# Altium PCB hv-distribution-board.PcbDoc
Units mm, origin at the board's own origin, x right, y up, seen from the top; angles counter-clockwise.
Board outline 75 x 47 mm, 2 copper layers (Top Layer, Bottom Layer), stack 1.57 mm thick; 31 components, 24 nets, 77 pads, 5 vias.
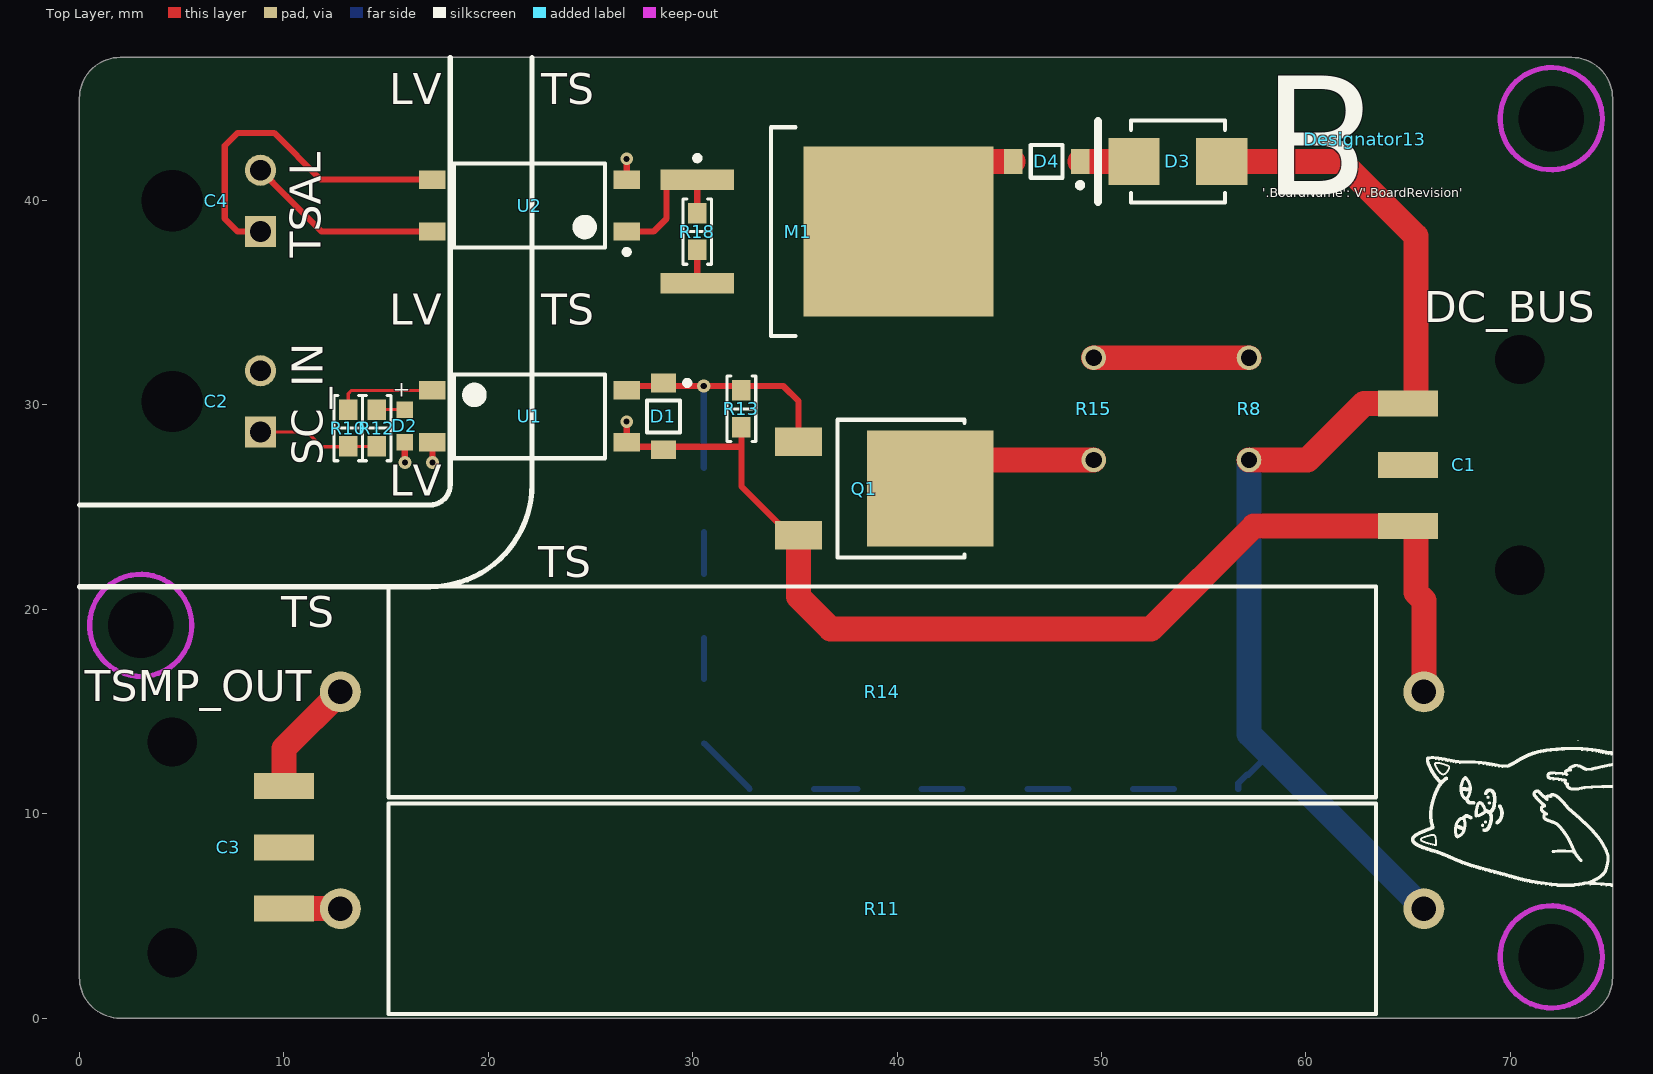
[diagram p0: Top Layer view]
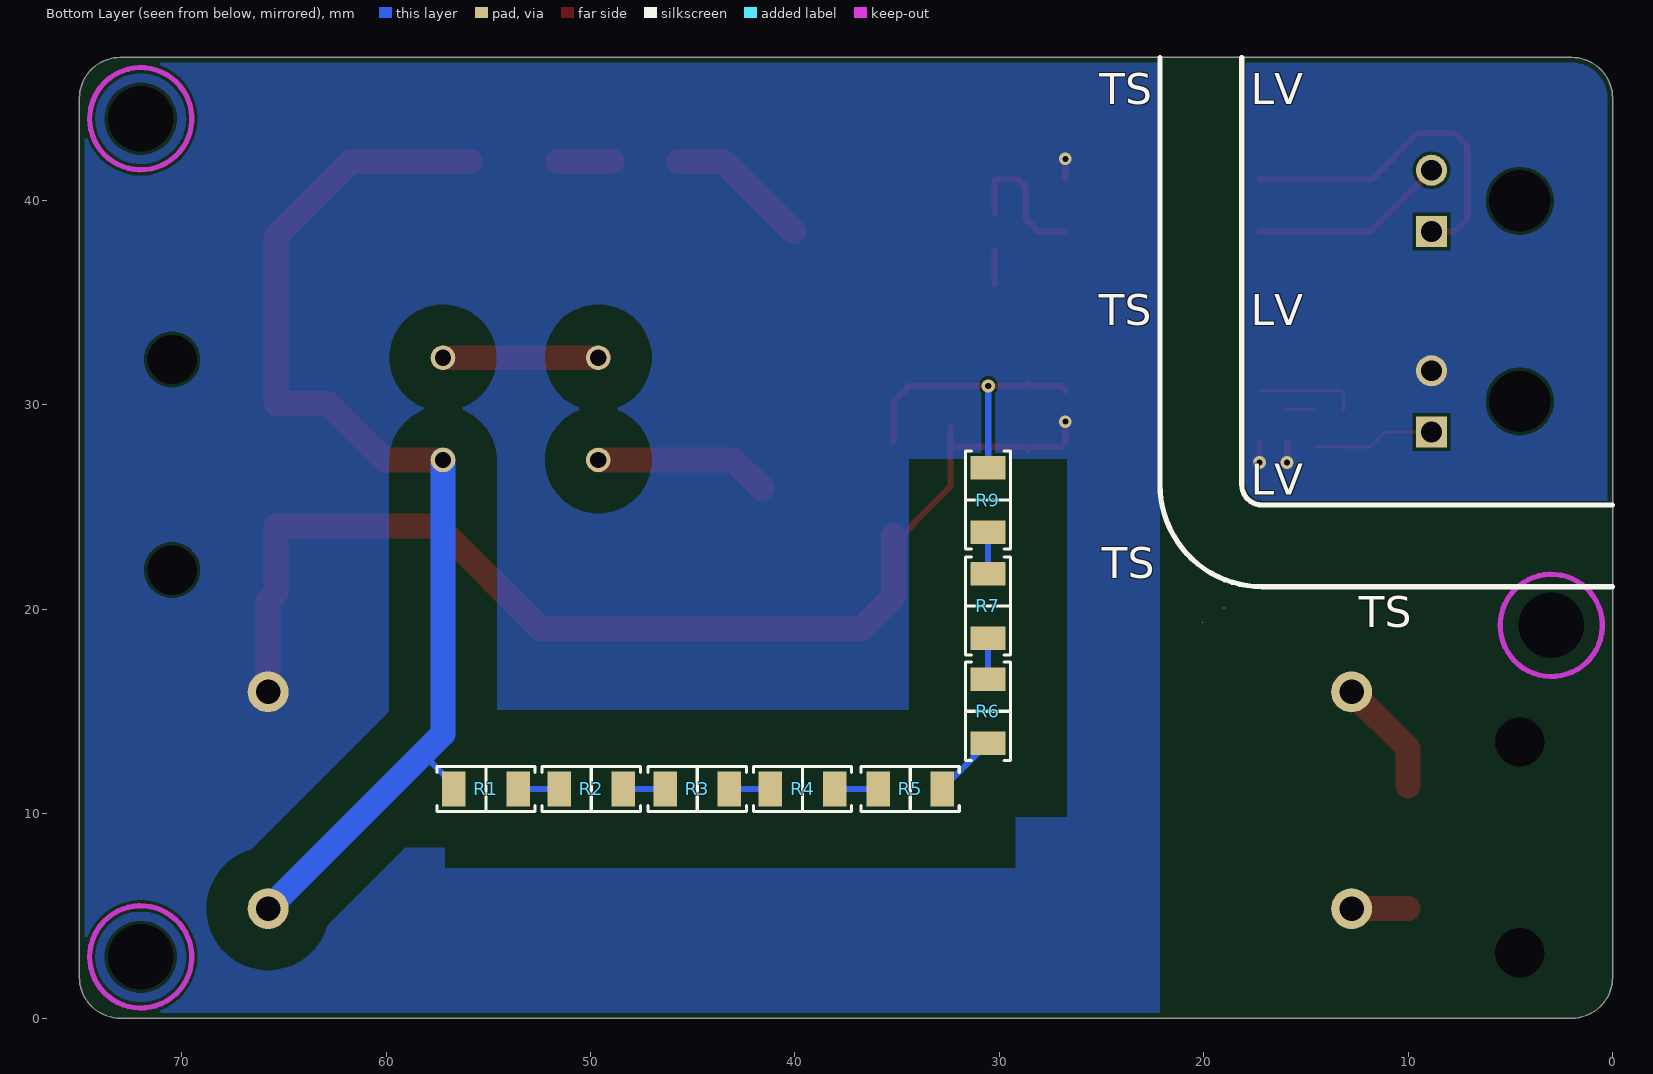
[diagram p1: Bottom Layer view, seen from below]
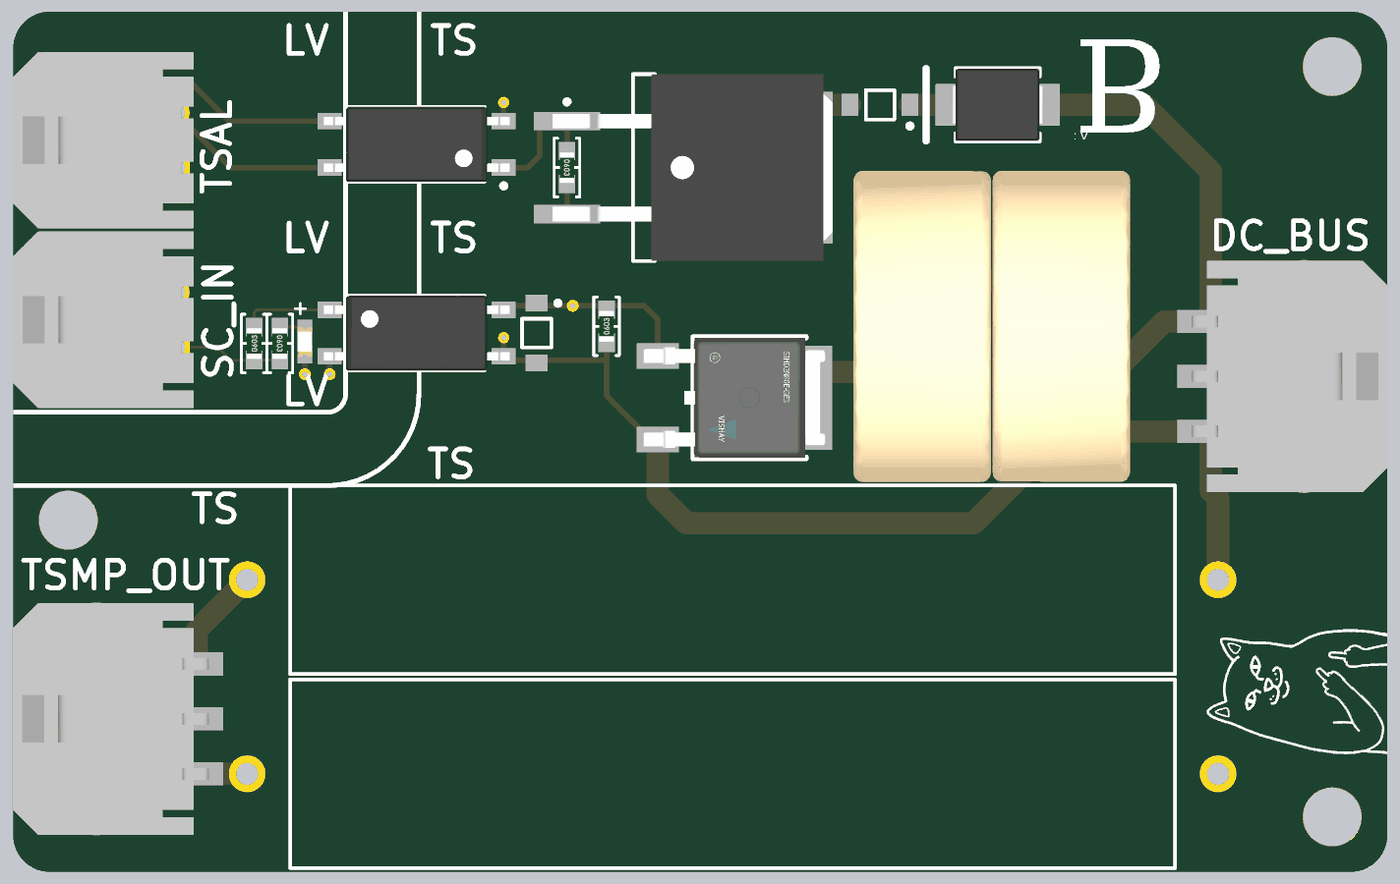
[diagram p2: 3D render of the assembled board from above, using the file's embedded part models]
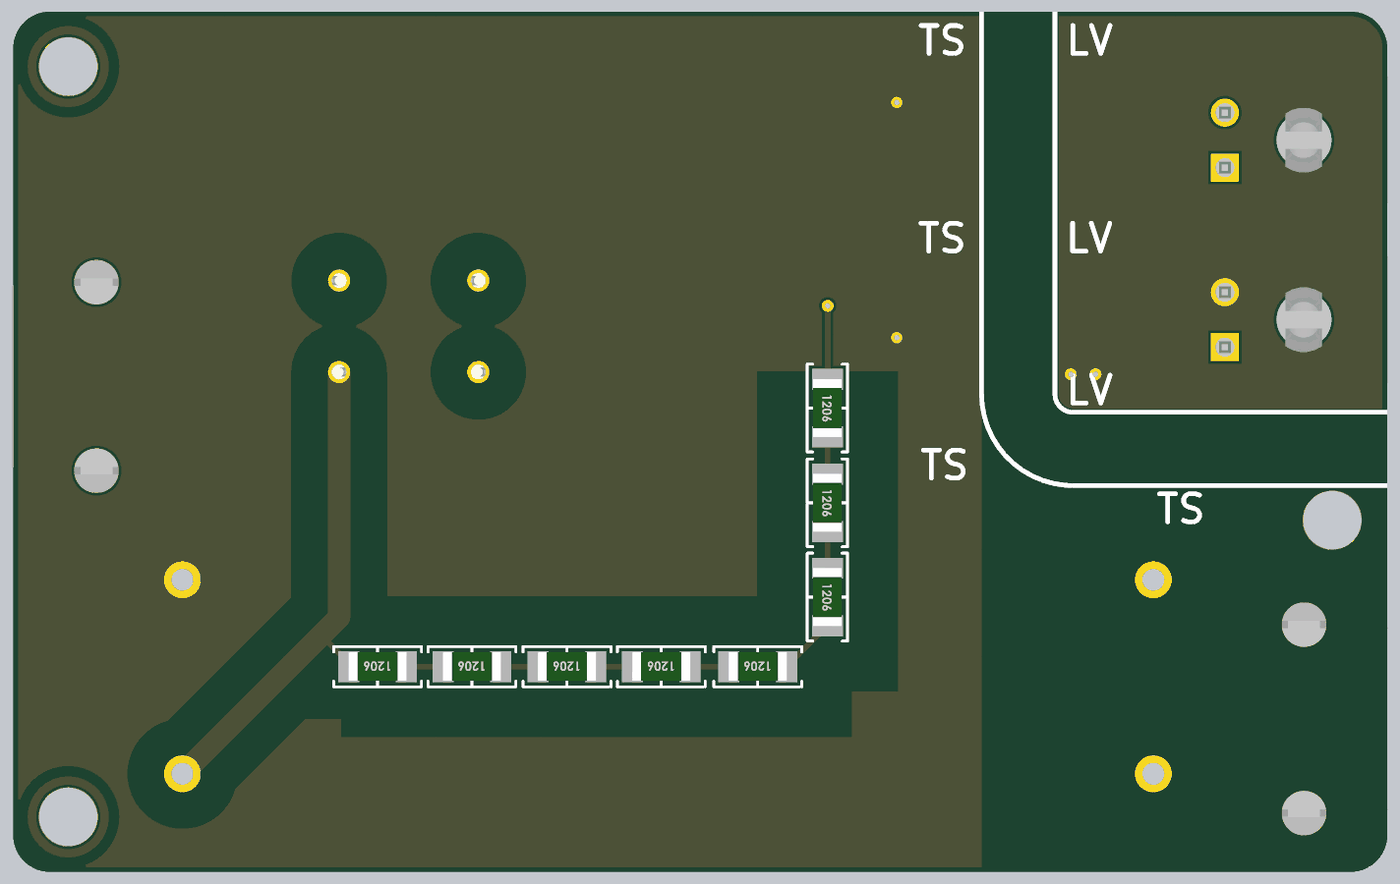
[diagram p3: 3D render of the assembled board from below, using the file's embedded part models]

## Layer stack, top to bottom
Top Solder: solder mask 0.015, Solder Resist, Dk 3.5
Top Layer: signal copper 0.035
Dielectric 1: dielectric 1.5, FR-4, Dk 4.8
Bottom Layer: signal copper 0.035
Bottom Solder: solder mask 0.015, Solder Resist, Dk 3.5

## Board outline
2,0 cw(c2,2) 0,2 0,45 cw(c2,45) 2,47 73,47 cw(c73,45) 75,45 75,2 cw(c73,2) 73,0

## Design rules (kind name [scope] priority, off if disabled: settings)
AcuteAngle [All] p1: minimum=4.50000000000000E+0001 checktracksonly=FALSE
BoardOutlineClearance [All] p1: gap=0.254 ignorepadtopadclearanceinfootprint=FALSE
Clearance Clearance_HV_Gate [InNet('TS-') vs InNet('GATE')] p1: gap=0.152 ignorepadtopadclearanceinfootprint=FALSE
Clearance Clearance_HV_VD [InNetClass('TS_VD') vs InNetClass('TS_VD')] p2: gap=2 ignorepadtopadclearanceinfootprint=FALSE
Clearance Clearance_HV_IM [InNetClass('TS_IM') vs InNetClass('TS_IM')] p3: gap=2 ignorepadtopadclearanceinfootprint=FALSE
Clearance Clearance_HV [InNetClass('TS') vs InNetClass('TS')] p4: gap=3 ignorepadtopadclearanceinfootprint=TRUE
Clearance Clearance_COMP [InNetClass('TS_COMP') vs InNetClass('TS_COMP') AND NOT InNet('TS+')] p5: gap=0.152 ignorepadtopadclearanceinfootprint=FALSE
Clearance Clearance_HV_LV [InNetClass('GLVS') vs InNetClass('TS') OR InNetClass('TS_IM') OR InNetClass('TS_COMP')] p6: gap=4 ignorepadtopadclearanceinfootprint=FALSE
Clearance Clearance_HV_TS_COMP [InNetClass('TS_COMP') vs (InNetClass('TS') OR InNetClass('TS_IM')) AND NOT (InNet('GATE') OR InNet('TS-'))] p7: gap=4 ignorepadtopadclearanceinfootprint=FALSE
Clearance [All] p8: gap=0.152 ignorepadtopadclearanceinfootprint=FALSE
ComponentClearance [All] p1: gap=0.1 collisioncheckmode=3 verticalgap=0.254 showdistances=FALSE
FanoutControl Fanout_Small [All] p1 off: bgadir=Out bgaviamode=Centered fanoutstyle=Auto fanoutdirection=Alternating viagrid=0.025 // Protel DXP Scope 1 Expression Was: (CompPinCount < 5)   Fanout_Small (Default Rule)
FanoutControl Fanout_Default [All] p2: bgadir=Out bgaviamode=Centered fanoutstyle=Auto fanoutdirection=Alternating viagrid=0.025 // Fanout_Default (Default Rule)
FanoutControl Fanout_SOIC [All] p3 off: bgadir=Out bgaviamode=Centered fanoutstyle=Auto fanoutdirection=Alternating viagrid=0.025 // Protel DXP Scope 1 Expression Was: IsSOIC   Fanout_SOIC (Default Rule)
FanoutControl Fanout_BGA [All] p4 off: bgadir=Out bgaviamode=Centered fanoutstyle=Auto fanoutdirection=Alternating viagrid=0.025 // Protel DXP Scope 1 Expression Was: IsBGA   Fanout_BGA (Default Rule)
FanoutControl Fanout_LCC [All] p5 off: bgadir=Out bgaviamode=Centered fanoutstyle=Auto fanoutdirection=Alternating viagrid=0.025 // Protel DXP Scope 1 Expression Was: IsLCC   Fanout_LCC (Default Rule)
HoleSize [All] p1: absolutevalues=TRUE maxlimit=7 minlimit=0.2 maxpercent=80.000 minpercent=20.000
MinimumAnnularRing [All] p1: minimumring=0.17
PolygonConnect [All] p1: connectstyle=Direct reliefconductorwidth=0.254 reliefentries=4 polygonreliefangle="90 Angle" airgapwidth=0.254
RoutingVias [All] p1: holewidth=0.3 width=0.64 viastyle="Through Hole" minholewidth=0.3 minwidth=0.61 maxholewidth=0.711 maxwidth=1.27
SMDEntry [All] p1 off: side=TRUE corner=TRUE anyangle=TRUE // Protel DXP Scope 1 Expression Was: not IsRoundPad
SMDToCorner [All] p1: distance=60000
SilkToSolderMaskClearance [All] p1 off: minsilkscreentomaskgap=0.254 clearancetoexposedcopper=TRUE // Protel DXP Scope 1 Expression Was: IsPad
SolderMaskExpansion [All] p1: expansion=0 istentingtop=FALSE
Width [All] p1: maxlimit=1.219 minlimit=0.152 preferedwidth=0.305
22 further rules are at their usual default settings.

## Classes and differential pairs
net class TS: GATE NetC1_2 NetQ1_4 NetR1_1 NetR2_1 NetR3_1 NetR4_1 NetR5_1 NetR6_1 NetR7_1 NetR8_2 TS+ TS-
component class voltage-detection: C4 D3 D4 M1 R18 U2
component class tsmp-resistors: C3 R11 R14
net class TS_VD: GATE NetR1_1 NetR2_1 NetR3_1 NetR4_1 NetR5_1 NetR6_1 NetR7_1 TS+
net class TS_COMP: NetC1_2 NetD3_2 NetD4_2 NetM1_1 NetM1_2 TS+ TS-
net class TS_IM: NetQ1_4 NetR8_2 TS+ TS-
net class GLVS: GND NetD2_2 NetR10_2 SC_END
component class discharge-circuit: C1 C2 D1 D2 Q1 R1 R2 R3 R4 R5 R6 R7 R8 R9 R10 R12 R13 R15 U1

## Components (designator, comment, footprint, x,y, rotation, side; value= is the part's Value field where it differs from the comment)
C1 "DC_BUS" 43650-0309 70.46,27.069 r90 top
C2 "SC_IN" 43650-0200 8.86,30.169 r270 top
C3 "TSMP_OUT" 43650-0309 4.54,8.358 r270 top
C4 "TSAL" 43650-0200 8.86,39.981 r270 top
D1 "MMSZ4707T1G" ONSC-SOD-123-2-425-04_V 28.571,29.439 r270 top
D2 "150060GS55040" WL-SMCW_0603_H=0.7 15.921,28.969 r90 top
D3 "S1MB-13-F" DIOD-SMB-2_V 53.732,41.91 r180 top
D4 "SZMMSZ5261BT1G" ONSC-SOD-123-2-425-04_V 47.316,41.91 r180 top
Designator13 "Comment" LOGO_BALTIC_10mm 62.865,43 r0 top
M1 "IXTA08N100D2HV" IXYS_TO-263HV 36.576,38.481 r0 top
Q1 "SIHD2N80E-GE3" FP-T16-0236-MFG 39.37,25.908 r270 top
R1 "SMD Resistor" "STACKPOLE CSR1206" 55.112,11.214 r0 bottom value=100k
R2 "SMD Resistor" "STACKPOLE CSR1206" 49.962,11.214 r0 bottom value=100k
R3 "SMD Resistor" "STACKPOLE CSR1206" 44.777,11.214 r0 bottom value=100k
R4 "SMD Resistor" "STACKPOLE CSR1206" 39.626,11.214 r0 bottom value=100k
R5 "SMD Resistor" "STACKPOLE CSR1206" 34.359,11.214 r0 bottom value=100k
R6 "SMD Resistor" "STACKPOLE CSR1206" 30.558,15.015 r270 bottom value=100k
R7 "SMD Resistor" "STACKPOLE CSR1206" 30.558,20.165 r270 bottom value=100k
R8 "PTCEL13R501RBE" PTCEL13 57.214,29.808 r90 top
R8 "PTCEL17R501TBE" PTCEL17 57.214,29.808 r90 top
R9 "SMD Resistor" "STACKPOLE CSR1206" 30.558,25.342 r270 bottom value=100k
R10 "SMD Resistor" "STACKPOLE CSR0603" 13.154,28.869 r90 top value=2k2
R11 "40F15KE" OHMITE_40_SERIES 39.267,5.358 r180 top
R12 "SMD Resistor" "STACKPOLE CSR0603" 14.551,28.869 r270 top value=820
R13 "SMD Resistor" "STACKPOLE CSR0603" 32.385,29.809 r90 top value=100k
R14 "40F15KE" OHMITE_40_SERIES 39.267,15.958 r180 top
R15 "PTCEL13R501RBE" PTCEL13 49.613,29.808 r270 top
R15 "PTCEL17R501TBE" PTCEL17 49.613,29.808 r270 top
R18 "SMD Resistor" "STACKPOLE CSR0603" 30.226,38.481 r270 top value=2k2
U1 "TCLT1000" VISH-SOP4L-4_V 22.021,29.439 r0 top
U2 "TCLT1000" VISH-SOP4L-4_V 22.021,39.751 r180 top

## Footprints (in the part's own frame and the unit in brackets; to place one, negate y for a bottom-side part, rotate by r counter-clockwise, add the part's x,y. Pads: shape width x height; smd on the part's side, far side on the other; paste and mask are expansions set on the pad)
43650-0200 [mm] "Micro-Fit 3.0 Right Angle Header, 3.00mm Pitch, Single Row, 2 Circuits"
  rect 1.524x1.524 hole 1.02: 1(1.5,0)
  round 1.524 hole 1.02: 2(-1.5,0)
  round 0 hole 3 unplated: ""(0,-4.32)
  body extent -4.83,-8.9 4.83,1, height 5.64
43650-0309 [mm] "Micro-Fit 3.0 Right-Angle Header, 3.00mm Pitch, Single Row, 3 Circuits, with PCB Press-fit Metal Retention Clip, Tin, Glow-Wire Capable, Black"
  rect 1.27x2.92 smd: 1(3,5.47) 2(0,5.47) 3(-3,5.47)
  round 0 hole 2.41: ""(-5.15,0) ""(5.15,0)
  body extent -6.32,-4.6 6.33,6.14, height 5.64
DIOD-SMB-2_V [mm] "Molded Diode, 2-Leads, Body 4.57x3.94mm"
  rect 2.5x2.3 smd: 1(-2.15,0) 2(2.15,0)
  silkscreen extent -2.3,-2 3.9,2, body extent -2.5,-1.97 2.5,1.97, height 2.5
FP-T16-0236-MFG [mil]
  rect 55x90 smd paste+0 mask+0: 1(-90,-165) 3(90,-165)
  rect 224.02x243.31 smd paste+0 mask+0: 4(0,88.35)
  silkscreen extent -132,-90 132,155, body extent -136,-214 136,214, height 10
IXYS_TO-263HV [mm] "D2-PAK, 3-Pads, Body 7,80x8,46mm (max), IPC Medium Density"
  rect 3.6x1 smd: 1(-6.35,2.54) 2(-6.35,-2.54)
  rect 9.3x8.3 smd: 3(3.5,0)
  silkscreen extent -6.47,-5.1 -1.55,5.1, body extent -7.15,-5.1 8.15,5.1, height 4.7
LOGO_BALTIC_10mm [mm]
OHMITE_40_SERIES [mm] "Ohmicone ® Silicone-Ceramic Conformal  Axial Terminal Wirewound  1% and 5% Tolerance Standard"
  round 2 hole 1.2: 1(-26.5,0) 2(26.5,0)
  silkscreen extent -24.15,-5.15 24.15,5.15, body extent -24.15,-5.15 24.15,5.15, height 10.3
ONSC-SOD-123-2-425-04_V [mm] "SOD, 2-Leads, Body 2.69x1.6mm"
  rect 0.91x1.22 smd: 1(-1.635,0) 2(1.635,0)
  silkscreen extent -1.76,-0.8 0.78,1.29, body extent -1.35,-0.8 1.35,0.8, height 1.35
PTCEL13 [mm]
  round 1.2 hole 0.8: 1(-2.5,0) 2(2.5,0)
  body extent -6.75,-3.5 6.75,3.5, height 16.75
PTCEL17 [mm]
  round 1.2 hole 0.8: 1(-2.5,0) 2(2.5,0)
  body extent -8.5,-3.75 8.5,3.75, height 20.25
"STACKPOLE CSR0603" [mm] "Chip Resistor, 2-Leads, Body 1.60x0.80mm, IPC Medium Density"
  rect 1x0.9 smd: 1(-0.9,0) 2(0.9,0)
  silkscreen extent -1.6,-0.7 1.6,0.7, body extent -0.85,-0.4 0.85,0.4, height 0.45
"STACKPOLE CSR1206" [mm] "Chip Resistor, 2-Leads, Body 3.13x1.55mm, IPC Medium Density"
  rect 1.15x1.7 smd: 1(-1.575,0) 2(1.575,0)
  silkscreen extent -2.4,-1.1 2.4,1.1, body extent -1.6,-0.78 1.6,0.77, height 0.55
VISH-SOP4L-4_V [mm] "SOP, 4-Leads, Body 4.1x7.7mm, Pitch 2.54mm"
  rect 1.3x0.9 smd: 1(-4.75,1.27) 2(-4.75,-1.27) 3(4.75,-1.27) 4(4.75,1.27)
  silkscreen extent -3.7,-2.05 3.7,2.05, body extent -5.07,-2.05 5.07,2.05, height 2.3
WL-SMCW_0603_H=0.7 [mm] "SMD Mono-color Chip LED, body 1.6x0.8mm"
  rect 0.8x0.8 smd: 1(-0.8,0) 2(0.8,0)
  body extent -0.8,-0.4 0.8,0.4, height 0.7

## Part data
C1 C3: library part "MicroFit3.0 3-Pin", "Molex Micro-Fit 3.0 3-Pin / 600V / 8.5A"
C2 C4: library part "MicroFit3.0 2-Pin", "Molex Micro-Fit 3.0 2-Pin / 600V / 8.5A"
D1: library part CMP-1060-00328-1, "Zener Voltage Regulator, 500 mW, 2-Pin SOD-123, Pb-Free, Tape and Reel", Manufacturer="On Semiconductor", ComponentLink1Description="Manufacturer URL", ComponentLink1URL=http://www.onsemi.com/, ComponentLink2Description=Datasheet, ComponentLink2URL=http://www.onsemi.com/pub_link/Collateral/MMSZ4678T1-D.PDF, ComponentLink3Description="Package Specification", ComponentLink3URL=http://www.onsemi.com/pub_link/Collateral/425-04.PDF, DatasheetVersion="Rev. 9", Mounting Technology="Surface Mount", P Max (W)=0.5, PackageDescription="2-Pin SOD, Body 1.6 x 2.69 mm", PackageReference=SOD-123-2-425-04, PackageVersion="Rev. G, 10/2009", Packing="Tape and Reel", PartNumber=MMSZ4707T1G, RoHS=Pb-Free, VZ Typ (V)=20
D2: library part 150060GS75000, "SMT Mono-color Chip LED Waterclear WL-SMCW, size 0603, Green, 3.2 V, 140 deg, 430 mcd", Emitting Color=Green, Forward Voltage="3.2 V", Operating Temperature="-40 to 85 degC", Chip Technology=InGaN, ComponentLink1Description=Manufacturer, ComponentLink1URL=http://www.we-online.de, ComponentLink2Description=Datasheet, ComponentLink2URL=https://katalog.we-online.de/led/datasheet/150060GS75000.pdf, Dominant Wavelength="525 nm", Luminous Intensity="430 mcd", Mounting Technology=SMT, Packaging="Tape and Reel", Part Number=150060GS75000, Peak Wavelength="515 nm", Published Date="November 2018", Publisher="Wurth Elektronik", Size=0603, Viewing Angle="140 deg"
D3: library part CMP-2000-07013-1, "Surface Mount Glass Passivated Rectifier / , 1 A, 1.1 V, -65 to 150 degC, 2-Pin SMD, RoHS, Tape and Reel", Average Rectified Current-Max=1A, Forward Voltage=1.1V, Manufacturer="Diodes Inc", Package Description="2-Pin Surface Mount Device, Body 4.315 x 3.62 mm", Package Reference=SMB-2, Peak Current-Max=30A, Reverse Current-Max=5µA, Reverse Voltage-Max [Vrrm]=1000V, Datasheet URL=http://www.diodes.com/_files/datasheets/ds16003.pdf, Datasheet Version="Rev. 24-2, 12/2014", Manufacturer URL=http://www.diodes.com/, Mounting Technology=SurfaceMount
D4: library part CMP-1060-00394-1, "Zener Voltage Regulator, 500 mW, 2-Pin SOD-123, Pb-Free, Tape and Reel", Manufacturer="On Semiconductor", ComponentLink1Description="Manufacturer URL", ComponentLink1URL=http://www.onsemi.com/, ComponentLink2Description=Datasheet, ComponentLink2URL=http://www.onsemi.cn/pub_link/Collateral/MMSZ5221BT1-D.PDF, ComponentLink3Description="Package Specification", ComponentLink3URL=http://www.onsemi.com/pub_link/Collateral/425-04.PDF, DatasheetVersion="Rev. 12", Mounting Technology="Surface Mount", P Max (W)=0.5, PackageDescription="2-Pin SOD, Body 1.6 x 2.69 mm", PackageReference=SOD-123-2-425-04, PackageVersion="Rev. G, 10/2009", Packing="Tape and Reel", PartNumber=SZMMSZ5261BT1G, RoHS=Pb-Free, VZ Typ (V)=47
M1: "D2 Series - 100V - 1700V N-Channel Depletion Mode Power MOSFETs, TO-263HV, RoHS", Manufacturer=Littelfuse, Category=MOSFETs, Manufacturer Part Number=IXTA08N100D2HV, Pricing 1="1=1,74230, 300=2,14500, 500=1,90100, 1000=1,67700, 2000=1,66000, 2500=1,64400, 3000=1,62700, 4000=1,61100, 5000=1,59500, 10000=1,57900, 20000=1,56300 (USD)", RoHS=Yes, Stock 1=30, Supplier 1="Arrow Electronics", Supplier Part Number 1=IXTA08N100D2HV
Q1: library part CMP-02550-000080-1, "MOSFET N-CH 800V 2.8A DPAK", Continuous Drain Current=2.8A, Drain To Source Breakdown Voltage=800V, Drain To Source Resistance=2.38Ω, Gate To Source Voltage=30V, Input Capacitace At Vds="315pF @ 100V", Manufacturer=Vishay, Max Forward Diode Voltage=1.2V, Max Junction Temp=+150°C, Package=T16-0236, Power Dissipation=62.5W, Pulse Drain Current=5A, Temperature="-55°C to +150°C", Temperature Range Low=-55°C, Automotive=No, Category=Trans, ComponentLink2Description=Datasheet, ComponentLink2URL=https://www.vishay.com/docs/91987/sihd2n80e.pdf, Depletion Mode=False, Device Class L1="Discrete Semiconductors", Device Class L2=Transistors, Device Class L3=MOSFETs, Digikey Description="MOSFET N-CH 800V 2.8A DPAK", Drain To Source Voltage=800V, Footprint Url=https://www.vishay.com/docs/72594/72594.pdf, Gate Charge At Vgs="9.8nC @ 10V", Height=2.507mm, Lead Free=Yes, Manufacturer Part Number=SIHD2N80E-GE3, Number of Channels=1, Number Of N Channels=1, Octopart=https://octopart.com/sihd2n80e-ge3-vishay-84840963, Reverse Recovery Charge=900nC, Reverse Recovery Time=278ns, RoHS=TRUE, Rthja Max=62°C/W, Temperature Range High=+150°C, Threshold Vgs Max=4V, Threshold Vgs Min=2V, Transconductance=1S, Turn Off Delay Time=19ns, Turn On Delay Time=11ns
R1 R2 R3 R4 R5 R6 R7 R9 R10 R12 R13 R18: "Resistor with multiple footprints"
R8 R15: "PTCEL Series 800 V 500 Ohm ±30 % Radial Inrush Current Limiter PTC Thermistor"
R8 R15: "PTCEL Series 1000 V 500 Ohm ±30 % Radial Inrush Current Limiter PTC Thermistor", Manufacturer="Vishay BCcomponents", Supplier Part Number 1=594-PTCEL17R501TBE, Tolerance=30%, ComponentLink1Description=http://www.vishay.com/docs/29165/ptcel.pdf?src-supplier=Digi-Key, ComponentLink1URL=http://www.vishay.com/docs/29165/ptcel.pdf?src-supplier=Digi-Key, Manufacturer Part Number=PTCEL17R501TBE, Pricing 1="1=3,37000, 5=3,30000, 10=3,15000, 25=3,00000, 50=2,70000, 100=2,55000, 200=2,46000, 500=2,25000, 1000=2,17000, 10000=2,17000 (USD)", RoHS=No, RoHS Compliant=No, Stock 1=130, Supplier 1=Mouser
R11 R14: "Wirewound Resistors 10watt 15K 1% Axial", Case/Package=Axial, Manufacturer=Ohmite, Max Power Dissipation=10W, Package Quantity=25, Resistance=15k, Resistor Type=Wirewound, Supplier Part Number 1=588-40F15KE, Temperature Coefficient=20ppm/°C, Tolerance=1%, Category="Through-Hole Resistors", ComponentLink4Description=Datasheet, ComponentLink4URL=https://www.ohmite.com/assets/docs/res_40.pdf, ComponentLink5Description="Product Page", ComponentLink5URL=https://www.ohmite.com/40-series, Length=1.902inch, Manufacturer Part Number=40F15KE, Mount="Through Hole", Number of Terminations=2, Packaging=Bulk, Power Rating=10W, Pricing 1="1=2,89000, 10=2,61000, 50=2,14000, 100=2,06000, 1000=1,35000, 10000=1,32000 (USD)", RoHS=Yes, RoHS Compliant=Yes, Series="Ohmicone® 40", Stock 1=619, Supplier 1=Mouser, Termination=Axial
U1 U2: library part CMP-2000-07234-1, "Optocoupler, Phototransistor Output, VCEO 70 V, -55 to 100 degC, 4-Pin SOP (SOP4L), RoHS, Tape and Reel", Manufacturer=Vishay/Semiconductor, Maximum Collector Current=50mA, Maximum Collector Emitter Saturation Voltage=300mV, Maximum Collector Emitter Voltage=70V, Maximum Current Transfer Ratio @ Current=600%, Maximum Forward Voltage=1.6V, Maximum Input Current=60mA, Maximum Power Dissipation=250mW, Maximum Reverse Voltage=6V, Minimum Isolation Voltage=5000Vrms, Operating Temperature=-40to100°C, Package=4SOP, Package Description="4-Pin Small Outline Package Integrated Circuit, Body 4.1 x 7.5 mm, Pitch 2.54 mm", Package Reference=SOP4L, Typical Forward Voltage=1.25V, Category=TransistorandPhotovoltaicOutputPhotoCouplers, Datasheet URL=http://www.vishay.com/docs/83515/tclt1000.pdf, Datasheet Version="Rev. 2.9, 12/2015", Input Type=DC, Manufacturer URL=http://www.vishay.com/, Mounting Technology=SurfaceMount, Number of Channels per Chip=1, Output Type=DC, Packaging=Tape&Reel

## Free pads (board coordinates)
  round 0 hole 3.2: ""(3,19.216) ""(72,3) ""(72,44)

## Via types
v1: diameter 0.64, hole 0.3, Top Layer to Bottom Layer, 3 vias
v2: diameter 0.61, hole 0.3, Top Layer to Bottom Layer, 2 vias

## Nets (pads, with @x,y where several pads share a name; then routed paths per layer and width w, separated by ;. In a path a pad name is that pad's centre, name@x,y a point inside that pad or via, vN(x,y) a via of type N, cw(c..) or ccw(c..) an arc to the next point about the centre after c; other vN are vias at no path point)
+24V: C4.2 U2.4 | length 9.7
  Top Layer w0.305: C4.2 10.125,40.216 11.86,38.481 U2.4
GATE: D1.1 Q1.1 R9.1 R13.2 U1.4 | length 14.9
  Top Layer w0.305: U1.4 26.988,30.926 28.423,30.926 D1.1 28.719,30.926 v1(30.541,30.926) 32.385,30.926 34.434,30.926 35.179,30.182 Q1.1
  Bottom Layer w0.305: v1(30.541,30.926) 30.541,26.935 R9.1
GND: C2.2 D2.1 U1.2 | length 2
  Top Layer w0.305: v1(15.921,27.187) D2.1 ; v1(17.271,27.187) U1.2
HV_PRSNT: C4.1 U2.3 | length 16.9
  Top Layer w0.305: C4.1 7.747,38.481 7.112,39.116 7.112,42.672 7.747,43.307 9.525,43.307 11.811,41.021 U2.3
NetC3_1: C3.1 R11.2 | length 2.8
  Top Layer w1.219: C3.1 R11.2
NetC3_3: C3.3 R14.2 | length 5.7
  Top Layer w1.219: C3.3 10.01,13.201 R14.2
NetD2_2: D2.2 R12.1 | length 1.4
  Top Layer w0.152: R12.1 D2.2
NetD3_2: D3.2 D4.1 | length 2.6
  Top Layer w1.219: D4.1 D3.2
NetD4_2: D4.2 M1.3 | length 7
  Top Layer w1.219: M1.3 43.505,41.91 D4.2
NetM1_1: M1.1 R18.1 U2.1 | length 7.1
  Top Layer w0.305: U2.1 28.084,38.481 28.719,39.116 28.719,40.673 29.067,41.021 M1.1 R18.1
NetM1_2: M1.2 R18.2 | length 1.6
  Top Layer w0.305: M1.2 R18.2
NetQ1_4: Q1.4 R15.2 | length 8.6
  Top Layer w1.219: Q1.4 43.014,27.308 R15.2@49.613,27.308
NetR1_1: R1.1 R2.2 | length 2
  Bottom Layer w0.305: R2.2 R1.1
NetR2_1: R2.1 R3.2 | length 2
  Bottom Layer w0.305: R3.2@46.387,11.214 R2.1
NetR3_1: R3.1 R4.2 | length 2
  Bottom Layer w0.305: R4.2 R3.1
NetR4_1: R4.1 R5.2 | length 2.1
  Bottom Layer w0.305: R5.2 R4.1
NetR5_1: R5.1 R6.2 | length 3.1
  Bottom Layer w0.305: R6.2 R5.1
NetR6_1: R6.1 R7.2 | length 2
  Bottom Layer w0.305: R6.1 R7.2
NetR7_1: R7.1 R9.2 | length 2
  Bottom Layer w0.305: R7.1 R9.2
NetR8_2: R8.2 R15.1 | length 7.6
  Top Layer w1.219: R15.1@49.613,32.308 R8.2@57.213,32.308
NetR10_2: R10.2 U1.1 | length 5
  Top Layer w0.152: R10.2 13.154,30.553 13.31,30.709 U1.1
SC_END: C2.1 R10.1 R12.2 | length 6
  Top Layer w0.152: C2.1 11.143,28.669 11.86,27.952 13.137,27.952 R10.1 R12.2
TS+: C1.1 D3.1 R1.2 R8.1 R11.1 | length 56.4
  Top Layer w1.219: D3.1 61.722,41.91 65.373,38.259 65.373,30.069 62.835,30.069 60.074,27.308 R8.1@57.214,27.308
  Bottom Layer w0.305: R1.2 56.687,11.489 57.11,11.912 57.173,11.912 58.193,12.932
  Bottom Layer w1.219: R8.1@57.214,27.308 57.214,13.912 58.193,12.932 R11.1
TS-: C1.3 D1.2 Q1.3 R13.1 R14.1 U1.3 U2.2 | length 58.8
  Top Layer w0.305: v2(26.771,29.185) U1.3 26.988,27.952 28.423,27.952 D1.2 28.719,27.952 32.385,27.952 ; U2.2 v2(26.771,42.037) ; R13.1 32.385,27.952 ; Q1.3 34.734,23.622 34.188,24.168 34.188,24.219 32.385,26.023 32.385,27.952
  Top Layer w1.219: Q1.3 35.179,20.615 36.75,19.044 52.419,19.044 57.444,24.069 65.373,24.069 65.373,20.822 65.767,20.428 R14.1
pads on no net: C1. C1.2 C2. C3. C3.2 C4.

## Polygon pours and split planes (outlines as drawn)
TS- on Bottom Layer "TS-_L02_P001" (solid, pour order 1): 22.144,0 75.383,0 75.383,50 22.144,50
GND on Bottom Layer "GND_L02_P000" (solid, pour order 0): 0,25.105 18.144,25.105 18.144,50 0,50

## Keep-outs
Top Layer:
  lines w0.1: 0,25.105 17.144,25.105 ccw(c17.144,26.105) 18.144,26.105
Bottom Layer:
  lines w0.1: 0,25.105 17.144,25.105 ccw(c17.144,26.105) 18.144,26.105 18.144,47
Keep-Out Layer:
  circle w0.254: c3,19.216 r2.5
  circle w0.254: c72,44 r2.5
  circle w0.254: c72,3 r2.5

## Silkscreen, mask and mechanical layers (free items; w line width, h text height)
Top Overlay:
  drawing of 22 lines, arcs and shapes, not listed
  text "LV" at 15.168,44.704 h1.52
  text "TS" at 22.598,44.704 h1.52
  text "'.BoardName': V'.BoardRevision'" at 57.866,40.008 h0.75
  text "LV" at 15.168,33.909 h1.52
  text "TS" at 22.598,33.909 h1.52
  text "LV" at 15.151,25.559 h1.52
  text "TS" at 22.436,21.581 h1.52
  text "TS" at 9.874,19.127 h1.52
Bottom Overlay:
  region: 19.007,20.066 19.007,20.073 19.014,20.073 19.014,20.066
  region: 20.059,19.351 20.052,19.351 20.052,19.358 20.059,19.358
  region: 17.488,16.478 17.488,16.485 17.495,16.485 17.495,16.478
  lines w0.254: 0,21.105 17.144,21.105 ccw(c17.144,26.105) 22.144,26.105 22.144,47 ; 0,25.105 17.144,25.105 ccw(c17.144,26.105) 18.144,26.105 18.144,47
  text "LV" at 17.69,44.704 h1.52
  text "TS" at 25.12,44.704 h1.52
  text "LV" at 17.701,33.899 h1.52
  text "TS" at 25.131,33.899 h1.52
  text "LV" at 17.69,25.6 h1.52
  text "TS" at 24.99,21.517 h1.52
  text "TS" at 12.414,19.127 h1.52
Mechanical 1:
  the board outline again, w0.254
  text "PCB must be conformally coated / for clearances to be rule-compliant!" at 42.799,74.803 h3
Board Outline:
  the board outline again, w0.2

## Text inside footprints (layer, text, board x,y; h text height)
D2: Top Overlay "+" at 16.221,31.069 h0.76 r180
Designator13: Top Overlay "B" at 57.866,47.999 h10 r180